# EAGLE board esp32-driver (EAGLE 7.1.0)
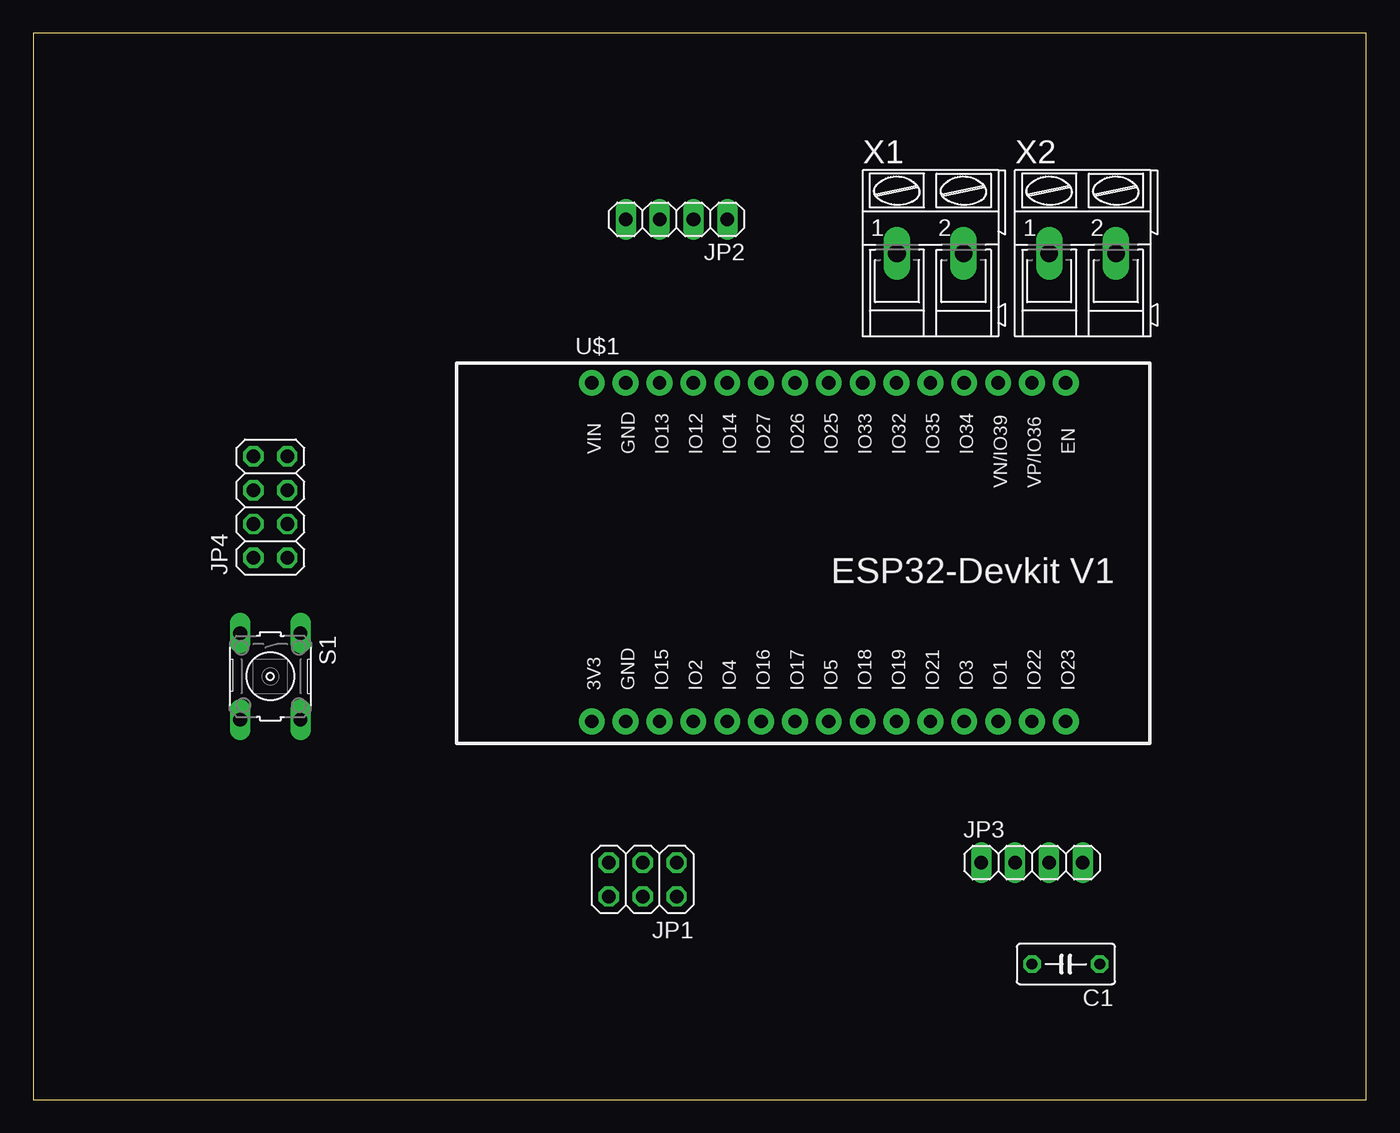
[diagram p0: board, top side]
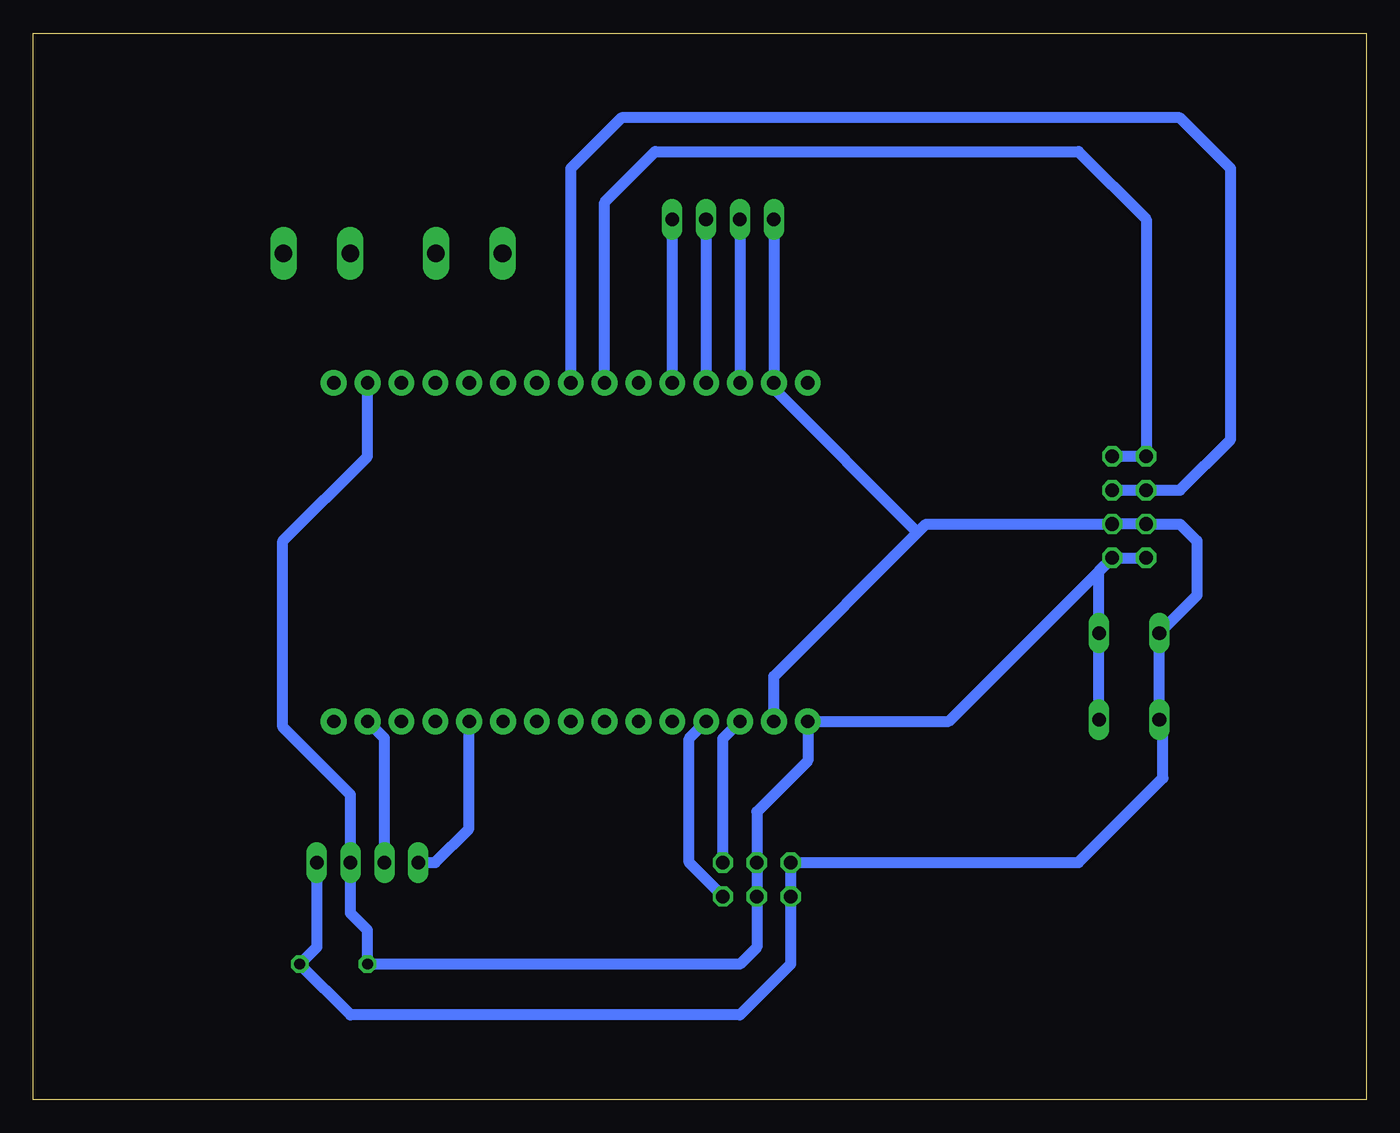
[diagram p1: board, bottom side, seen from below]

Size 100 x 80 mm. Coordinates in mm from the lower left corner, seen from the top.
Outline: 0,0 100,0 100,80 0,80 0,0
Copper layers (1*16): Top 0.035mm / dielectric 1.5mm / Bottom 0.035mm
Design rules "default": minimum track width 10mil, minimum drill 24mil, track to track 8mil, track to pad 8mil, pad to pad 8mil, via to via 8mil, smd to smd 8mil, copper to edge 40mil, drill to drill 8mil, minimum pad ring 10mil, minimum via ring 8mil, stop-mask expansion 4mil, vias tented up to drill 0mil, thermal gap 10mil

## Footprints (pad centres in the part's own frame; a part is rotated, then mirrored left to right if it is on the bottom)
C050-030X075 = drill 0.813 octagon: 1 -2.54,0; 2 2.54,0
2X03 = drill 1.016 octagon: 1 -2.54,-1.27; 2 -2.54,1.27; 3 0,-1.27; 4 0,1.27; 5 2.54,-1.27; 6 2.54,1.27
1X04 = drill 1.016 long: 1 -3.81,0; 2 -1.27,0; 3 1.27,0; 4 3.81,0
2X04 = drill 1.016 octagon: 1 -3.81,-1.27; 2 -3.81,1.27; 3 -1.27,-1.27; 4 -1.27,1.27; 5 1.27,-1.27; 6 1.27,1.27; 7 3.81,-1.27; 8 3.81,1.27
B3F-10XX = drill 1.016 long: 1 -3.251,2.261; 2 3.251,2.261; 3 -3.251,-2.261; 4 3.251,-2.261
ESP32-DEVKITV1 = drill 1 pad 1.93: 3V3 -16.52,-12.27; D1 13.96,-12.27; D2 -8.9,-12.27; D3 11.42,-12.27; D4 -6.36,-12.27; D5 1.26,-12.27; D12 -8.9,13.135; D13 -11.44,13.135; D14 -6.36,13.135; D15 -11.44,-12.27; D16 -3.82,-12.27; D17 -1.28,-12.27; D18 3.8,-12.27; D19 6.34,-12.27; D21 8.88,-12.27; D22 16.5,-12.27; D23 19.04,-12.27; D25 1.26,13.135; D26 -1.28,13.135; D27 -3.82,13.135; D32 6.34,13.135; D33 3.8,13.135; D34 11.42,13.135; D35 8.88,13.135; D36 16.5,13.135; D39 13.96,13.135; EN 19.04,13.135; GND@1 -13.98,13.135; GND@2 -13.98,-12.27; VIN -16.52,13.135
AK300/2 = drill 1.321 long: 1 -2.515,0; 2 2.489,0

## Placement (x,y rotation side)
C1  [C050-030X075]  77.47,10.16 180 top
JP1  [2X03]  45.72,16.51 180 top
JP2  [1X04]  48.26,66.04 180 top
JP3  [1X04]  74.93,17.78 0 top
JP4  [2X04]  17.78,44.45 90 top
S1  [B3F-10XX]  17.78,31.75 270 top
U$1  ESP32DEVKITV1  [ESP32-DEVKITV1]  58.42,40.64 0 top
X1  [AK300/2]  67.31,63.5 0 top
X2  [AK300/2]  78.74,63.5 0 top

## Library data of the parts
C1 = rcl; SPICEPREFIX: C
JP1-JP4 = pinhead
S1 = switch-omron; MPN: B3F-1000; OC_FARNELL: 176432; OC_NEWARK: 36M3542
U$1 = esp32-devkitv1
X1 X2 = con-ptr500; OC_FARNELL: unknown; OC_NEWARK: unknown

## Nets
GND: C1.1 JP1.5 JP1.6 JP2.4 JP3.4 JP4.3 JP4.4 S1.3 S1.4 U$1.GND@1 U$1.GND@2
MOISTURE: JP1.2 U$1.D2
OUT1: JP2.1 U$1.D14
OUT2: JP2.2 U$1.D12
OUT3: JP2.3 U$1.D13
PH: JP1.1 U$1.D15
SCL: JP3.2 U$1.D22
SCL2: JP4.5 JP4.6 U$1.D25
SDA: JP3.1 U$1.D21
SDA2: JP4.7 JP4.8 U$1.D26
V: C1.2 JP1.3 JP1.4 JP3.3 JP4.1 JP4.2 S1.1 S1.2 U$1.3V3 U$1.D36
VIN: U$1.VIN

## Tracks (layer width: path | path; a pad name or v marks a point on that pad's centre or on a via)
GND
  Bottom 0.813: U$1.GND@2 44.44,31.76 33.66,42.55 | 33.66,42.55 33.02,43.18 JP4.3 JP4.4 13.97,43.18 12.7,41.91 12.7,37.82 S1.3 S1.4 15.24,28.22 15.24,24.13 21.59,17.78 JP1.5 JP1.6 43.18,10.16 46.99,6.35 76.2,6.35 C1.1 78.74,11.43 JP3.4 | 33.66,42.55 44.44,53.33 U$1.GND@1 44.45,53.78 JP2.4
MOISTURE
  Bottom 0.813: JP1.2 50.8,17.78 50.8,27.09 U$1.D2
OUT1
  Bottom 0.813: JP2.1 52.07,53.78 U$1.D14
OUT2
  Bottom 0.813: JP2.2 49.53,53.78 U$1.D12
OUT3
  Bottom 0.813: JP2.3 46.99,53.78 U$1.D13
PH
  Bottom 0.813: JP1.1 48.26,27.09 U$1.D15
SCL
  Bottom 0.813: JP3.2 73.66,27.11 U$1.D22
SCL2
  Bottom 0.813: JP4.6 JP4.5 13.97,45.72 10.16,49.53 10.16,69.85 13.97,73.66 55.88,73.66 59.69,69.85 59.69,53.78 U$1.D25
SDA
  Bottom 0.813: JP3.1 69.85,17.78 67.31,20.32 U$1.D21
SDA2
  Bottom 0.813: JP4.7 JP4.8 16.51,66.04 21.59,71.12 53.34,71.12 57.14,67.32 U$1.D26
V
  Bottom 0.813: JP4.1 31.32,28.37 U$1.3V3 41.9,25.41 45.72,21.59 JP1.3 JP1.4 45.72,11.43 46.99,10.16 C1.2 74.93,12.7 76.2,13.97 JP3.3 76.2,22.86 81.28,27.94 81.28,41.91 74.93,48.26 U$1.D36 | JP4.1 JP4.2 | S1.2 S1.1 20.04,39.65 JP4.1